# Altium PCB Detect_IR_v2_PCB.PcbDoc
Units mm, origin at the board's own origin, x right, y up, seen from the top; angles counter-clockwise.
Board outline 22.5 x 38.5 mm, 2 copper layers (Top Layer, Bottom Layer), stack 1.571 mm thick; 13 components, 8 nets, 36 pads, 5 vias.
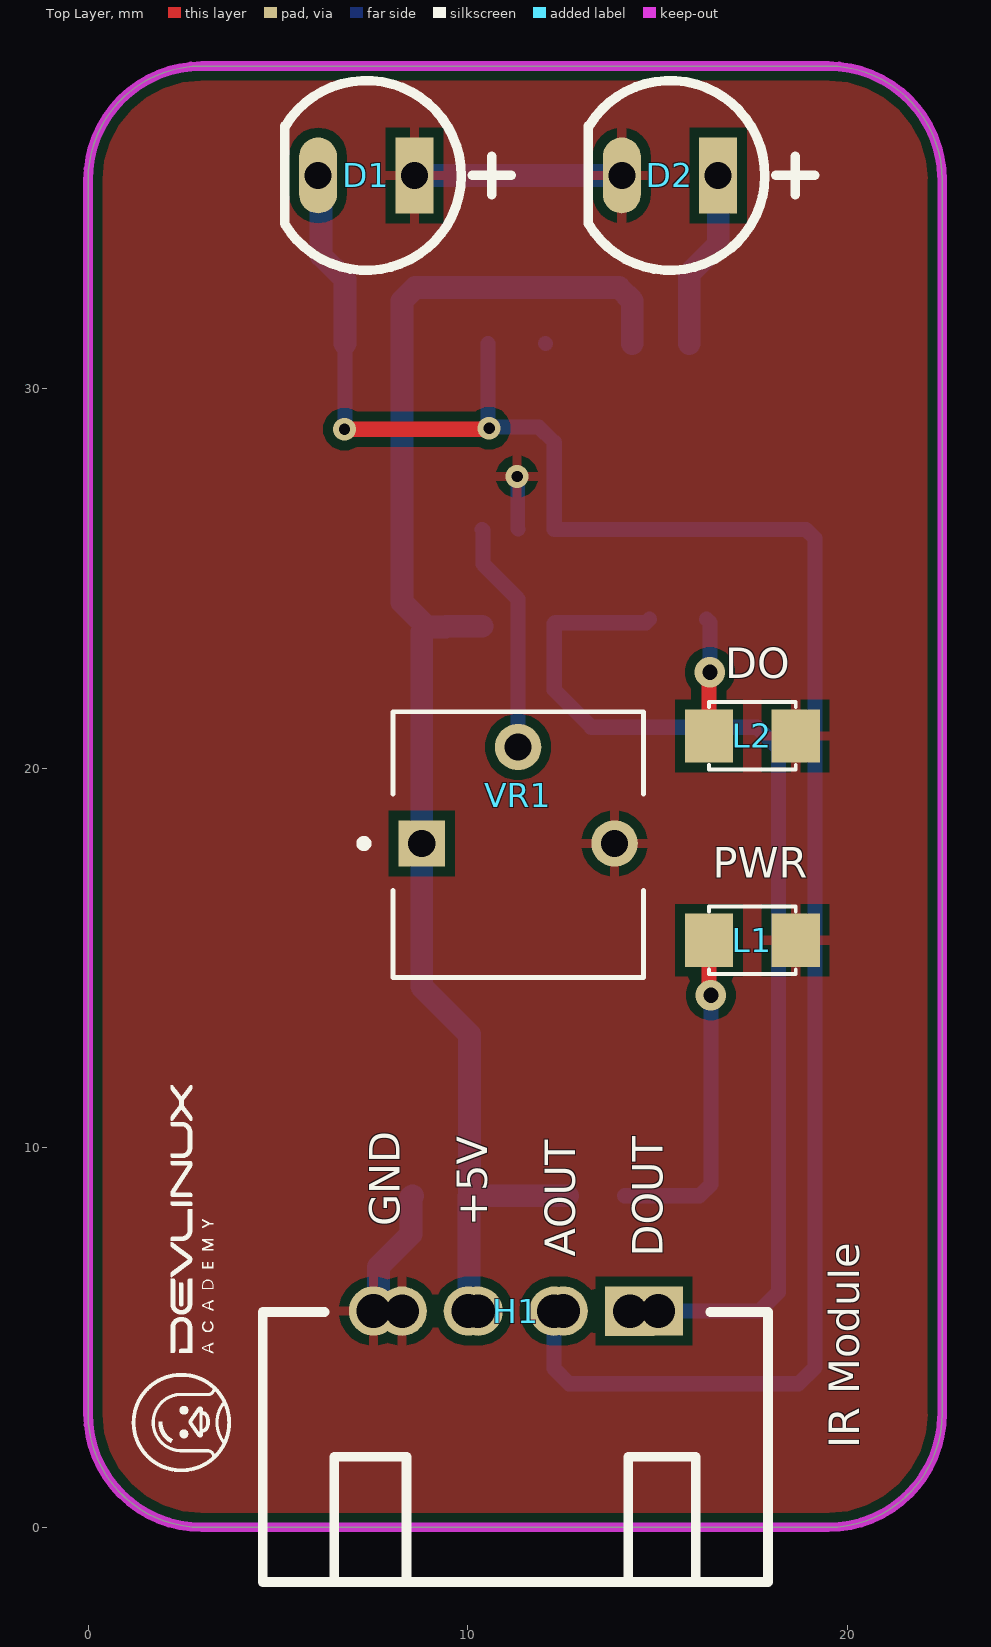
[diagram p0: Top Layer view]
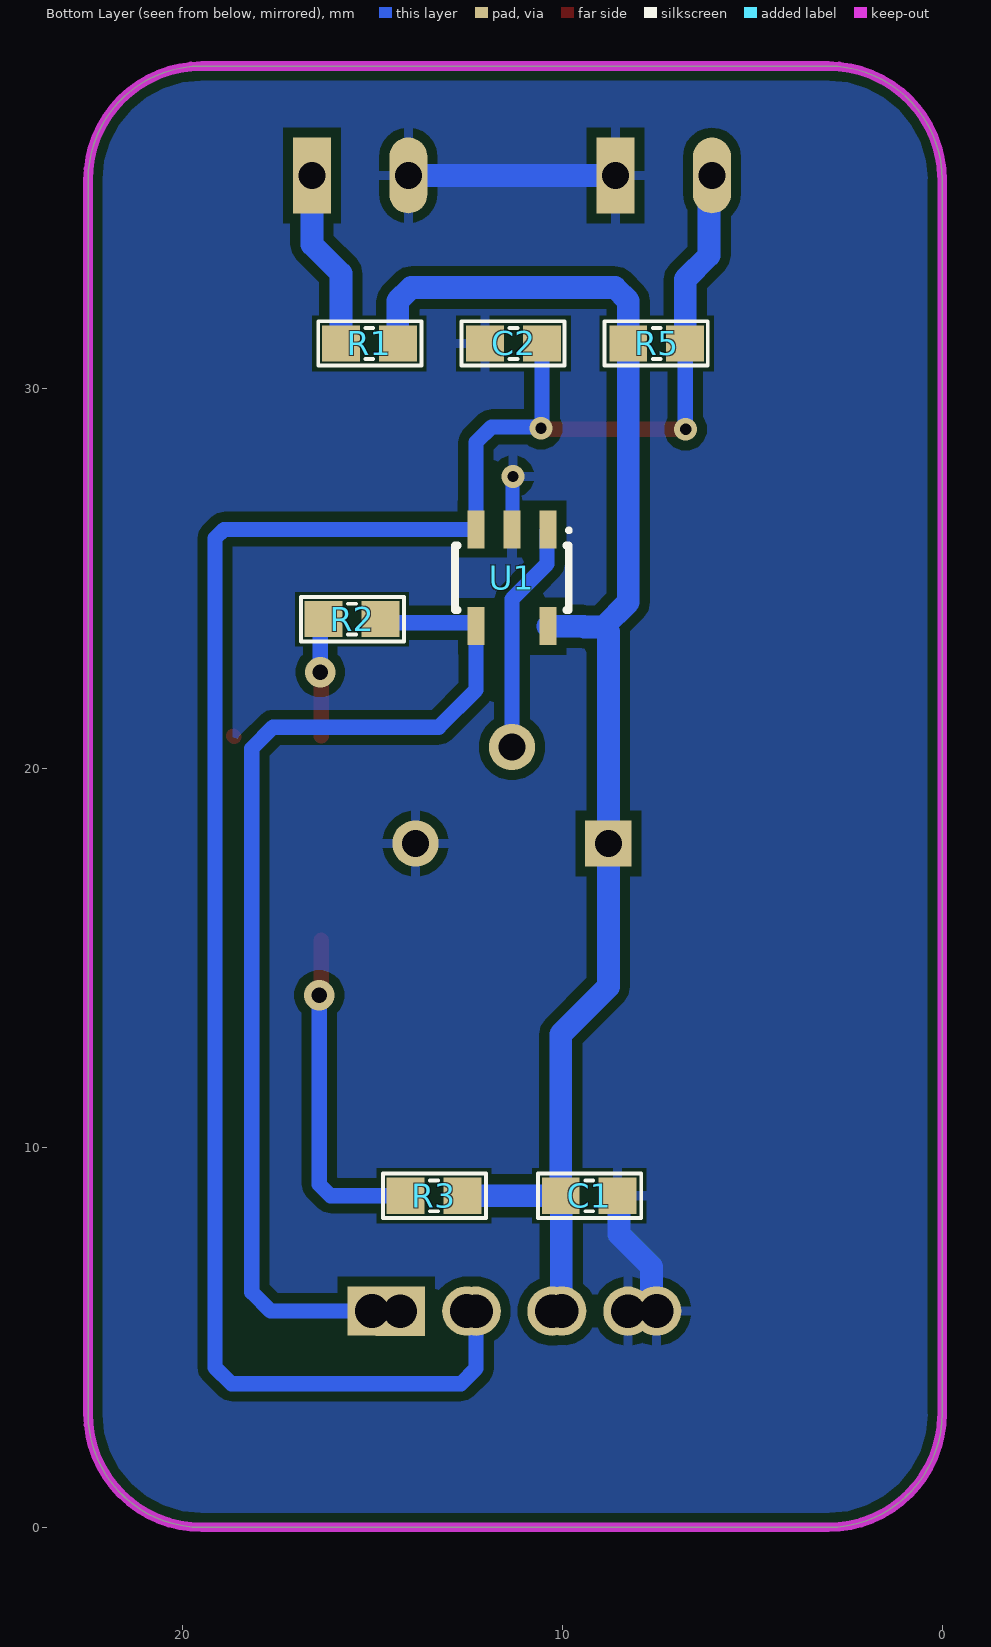
[diagram p1: Bottom Layer view, seen from below]
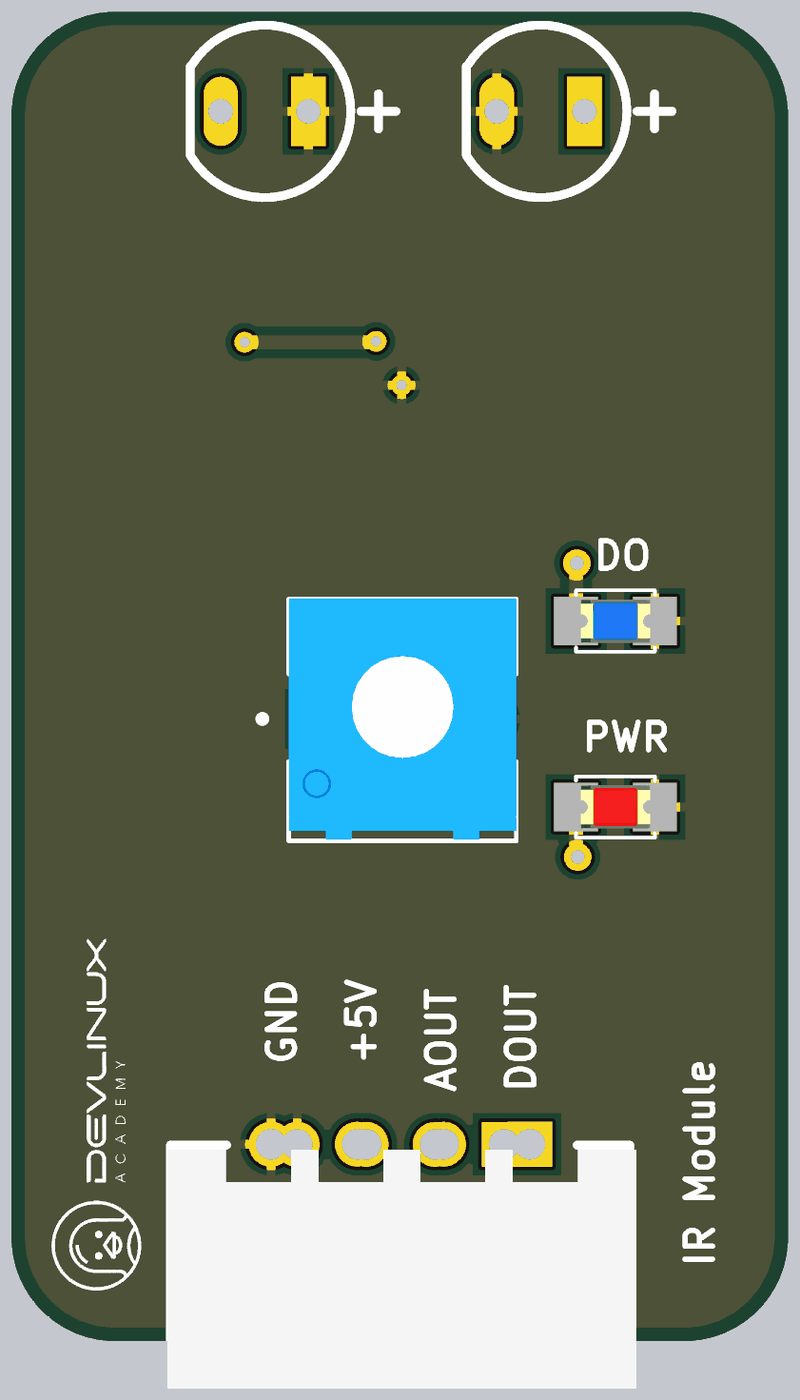
[diagram p2: 3D render of the assembled board from above, using the file's embedded part models]
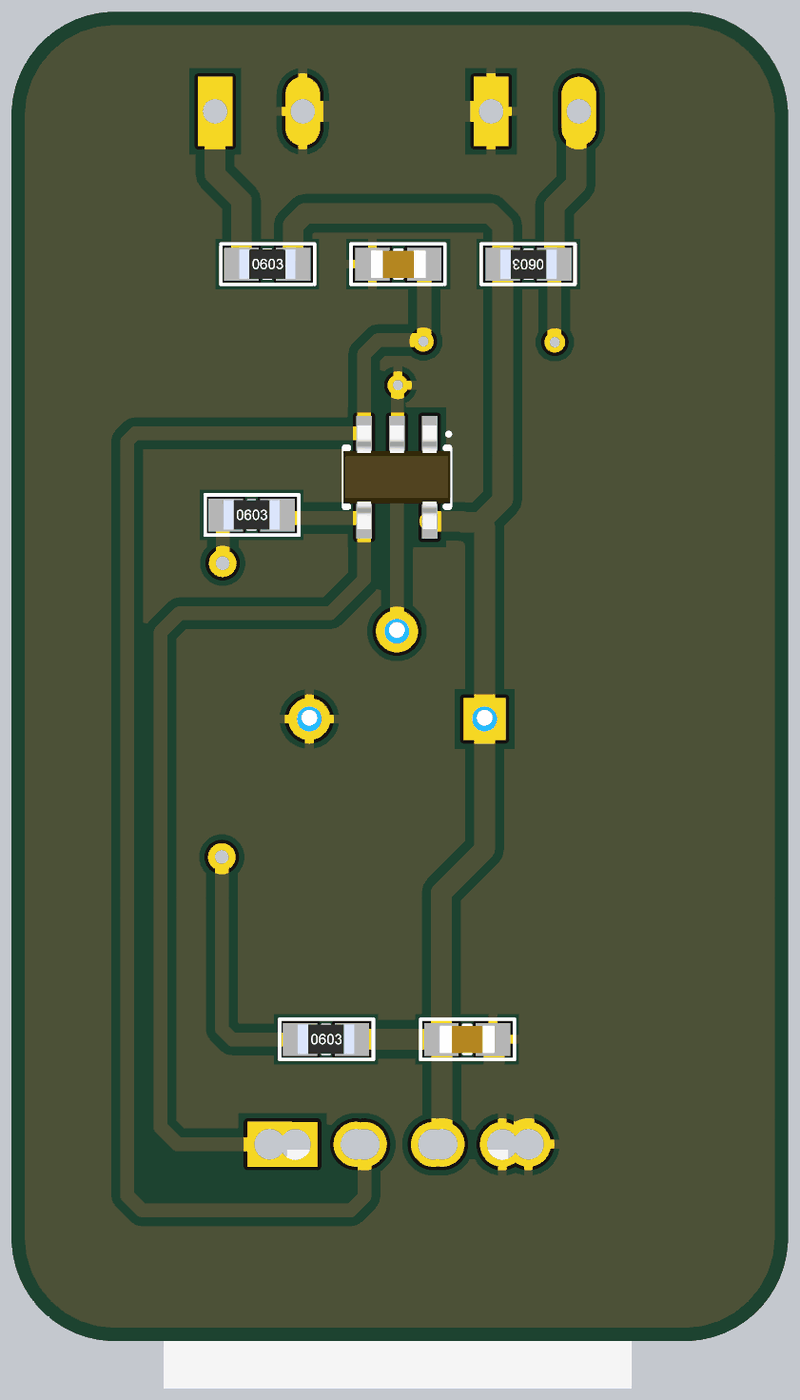
[diagram p3: 3D render of the assembled board from below, using the file's embedded part models]

## Layer stack, top to bottom
Top Solder: solder mask 0.0102, Solder Resist, Dk 3.5
Top Layer: signal copper 0.0356
Dielectric 1: dielectric 1.5, FR-4, Dk 4.8
Bottom Layer: signal copper 0.0356
Bottom Solder: solder mask 0.0102, Solder Resist, Dk 3.5

## Board outline
0,3 0,35.5 cw(c3,35.5) 3,38.5 19.5,38.5 cw(c19.5,35.5) 22.5,35.5 22.5,3 cw(c19.5,3) 19.5,0 3,0 cw(c3,3)

## Design rules (kind name [scope] priority, off if disabled: settings)
Clearance [All] p1: gap=0.254 ignorepadtopadclearanceinfootprint=FALSE except(0: Arc-Hole Track-Hole SMDPad-Hole THPad-Hole Via-Hole Fill-Hole Poly-Hole Region-Hole Text-Hole)
PolygonConnect [All] p1: connectstyle=Relief reliefconductorwidth=0.254 reliefentries=4 polygonreliefangle="90 Angle" airgapwidth=0.254
RoomDefinition Detect_IR_v2_SCH [InComponentClass('Detect_IR_v2_SCH')] p1: confinementstyle=ConfineIn formatcopy=TRUE lockcomponents=FALSE outline -48.133,-46.177 2.667,-46.177 2.667,-20.777 -48.133,-20.777
RoutingVias [All] p1: holewidth=0.4 width=0.8 viastyle="Through Hole" minholewidth=0.3 minwidth=0.6 maxholewidth=0.5 maxwidth=1
SolderMaskExpansion [All] p1: expansion=0.102 istentingtop=FALSE
Width [All] p1: maxlimit=0.6 minlimit=0.254 preferedwidth=0.4
30 further rules are at their usual default settings.

## Components (designator, comment, footprint, x,y, rotation, side; value= is the part's Value field where it differs from the comment)
C1 "100nF" "tu 0603" 9.296,8.738 r180 bottom
C2 "100nF" "tu 0603" 11.29,31.191 r0 bottom
D1 "PT334B" LED_CIRCLE_DIP_2P_5MM 7.332,35.618 r180 top
D2 "PT334C" LED_CIRCLE_DIP_2P_5MM 15.332,35.618 r180 top
H1 "Header 4P 2.54 + 2.0 Duc Cong" "Header 4P DC 2.54 + 2.0" 14.995,5.675 r270 top
L1 "LED RED" LED-0805-Red 16.358,15.469 r0 top
L2 "LED BLUE" LED-0805-Blue 16.358,20.853 r0 top
R1 "330" "tro smd 0603" 15.088,31.191 r180 bottom
R2 "1k" "tro smd 0603" 15.545,23.927 r180 bottom
R3 "1k" "tro smd 0603" 13.386,8.738 r180 bottom
R5 "10k" "tro smd 0603" 7.518,31.191 r0 bottom
U1 "LM321" sot23-5 11.332,25.019 r270 bottom
VR1 "10k" TRIM_3362P-1-102 11.332,18.019 r0 top

## Footprints (in the part's own frame and the unit in brackets; to place one, negate y for a bottom-side part, rotate by r counter-clockwise, add the part's x,y. Pads: shape width x height; smd on the part's side, far side on the other; paste and mask are expansions set on the pad)
"Header 4P DC 2.54 + 2.0" [mm]
  rect 1.3x1.3 hole 0.889: 1(-0.025,0.025) 1(-0.022,-0.719)
  round 1.3 hole 0.889: 2(-0.025,-2.475) 2(-0.022,-2.719) 3(-0.025,-4.975) 3(-0.022,-4.719) 4(-0.025,-7.475) 4(-0.022,-6.718)
  silkscreen extent 0,-10.39 7.11,2.92, body extent 0.13,-10.48 7.06,3.11, height 7.38
LED-0805-Blue [mil]
  rect 50x55 smd: 1(0,0) 2(90,0)
  silkscreen extent 0,-35 90,35, body extent 5,-25 85,25, height 43
LED-0805-Red [mil]
  rect 50x55 smd: 1(0,0) 2(90,0)
  silkscreen extent 0,-35 90,35, body extent 5,-25 85,25, height 43
LED_CIRCLE_DIP_2P_5MM [mm]
  rect 1x2 hole 0.711: 1(-1.27,0)
  oval 1x2 hole 0.711: 2(1.27,0)
  silkscreen extent -3.81,-2.5 2.15,2.5
sot23-5 [mm]
  rect 1x0.45 smd: 1(-1.275,0.95) 2(-1.275,0) 3(-1.275,-0.95) 4(1.275,-0.95) 5(1.275,0.95)
  silkscreen extent -1.3,-1.5 0.85,1.55, body extent -1.5,-1.55 1.5,1.55, height 1.1
TRIM_3362P-1-102 [mm]
  rect 1.222x1.222 / inner round 1.222 / far side rect 1.222x1.222 hole 0.714: 1(-2.54,0)
  round 1.222 hole 0.714: 2(0,2.54) 3(2.54,0)
  silkscreen extent -4.16,-3.53 3.3,3.47, body extent -3.3,-3.49 3.3,3.49, height 4.88
"tro smd 0603" [mm] "Chip Capacitor, 2-Leads, Body 1,60x0,80mm, IPC Medium Density"
  rect 1x0.95 smd mask+0.076: 1(-0.75,0) 2(0.75,0)
  silkscreen extent -1.35,-0.58 1.37,0.58, body extent -0.82,-0.42 0.82,0.43, height 0.44
"tu 0603" [mm] "Chip Capacitor, 2-Leads, Body 1,60x0,80mm, IPC Medium Density"
  rect 1x0.95 smd mask+0.076: 1(-0.75,0) 2(0.75,0)
  silkscreen extent -1.35,-0.58 1.37,0.58, body extent -0.8,-0.4 0.8,0.4, height 0.9

## Part data
C1 C2: library part "Tu 0603 104 50V 10%", "Dán", Chung_Loai=Dán, Don_Vi=Con, Ma_Hang=MH004568, So_Chan=2, Ten_Linh_Kien="Tụ 0603 104-100nF 10% 50V"
D1 D2: library part LED_DIP_2P, "Led"
H1: "Cắm", Chung_Loai=Cắm, Don_Vi=Con, Ma_Hang=MH001310, Ten_Linh_Kien="Header 4P XH2.54-4P Đực Cong"
L1: library part "LED 0805 Do", "Dán", Chung_Loai=Dán, Don_Vi=Con, Ma_Hang=MH000897, Ten_Linh_Kien="LED 0805 Màu Đỏ (Red)"
L2: library part "LED 0805 Xanh Duong", "Dán", Chung_Loai=Dán, Don_Vi=Con, Ma_Hang=MH002327, Ten_Linh_Kien="LED 0805 Màu Xanh Dương (Blue)"
R1 R5: library part "Tro 0603 1% 10k", "Dán", Chung_Loai=Dán, Don_Vi=Con, Ma_Hang=MH006333, So_Chan=2, Ten_Linh_Kien="Trở 0603 1% 10k"
R2 R3: library part "Tro 0603 1% 1k", "Dán", Chung_Loai=Dán, Don_Vi=Con, Ma_Hang=MH006334, So_Chan=2, Ten_Linh_Kien="Trở 0603 1% 1k"
U1: "Opamp"
VR1: library part "Bien tro vuong", "TRIMMER - 1/4in SQ ST CERMET", Package="3362P-1 Bourns Inc.", Check_prices=https://www.snapeda.com/parts/3362P-1-102/Bourns/view-part/?ref=eda, MF=Bourns, MP=3362P-1-102, SnapEDA_Link=https://www.snapeda.com/parts/3362P-1-102/Bourns/view-part/?ref=snap

## Via types
v1: diameter 0.6, hole 0.3, Top Layer to Bottom Layer, 3 vias
v2: diameter 0.8, hole 0.4, Top Layer to Bottom Layer, 2 vias

## Nets (pads, with @x,y where several pads share a name; then routed paths per layer and width w, separated by ;. In a path a pad name is that pad's centre, name@x,y a point inside that pad or via, vN(x,y) a via of type N, cw(c..) or ccw(c..) an arc to the next point about the centre after c; other vN are vias at no path point)
+5: C1.1 H1.3 R1.2 R3.2 R5.2 U1.5 VR1.1 | length 39
  Bottom Layer w0.6: H1.3@10.02,5.7 10.033,5.713 10.033,8.724 C1.1 ; U1.5 9.443,23.744 9.418,23.718 8.921,23.718 ; R3.2 C1.1 ; R1.2 14.338,32.313 13.986,32.664 8.62,32.664 8.268,32.313 R5.2 8.268,24.371 8.921,23.718 ; 8.921,23.718 8.792,23.589 VR1.1 8.792,14.246 10.046,12.991 C1.1
A_OUT: C2.1 D1.2 H1.2 R5.1 U1.3 | length 54.8
  Top Layer w0.4: v1(6.756,28.931) 10.541,28.931 v1(10.566,28.956)
  Bottom Layer w0.4: v1(6.756,28.931) 6.768,28.943 R5.1 ; C2.1 10.54,28.982 v1(10.566,28.956) 10.605,28.994 11.874,28.994 12.282,28.587 U1.3 18.917,26.294 19.152,26.059 19.152,4.216 18.72,3.785 12.675,3.785 12.276,4.183 H1.2@12.276,5.697
  Bottom Layer w0.6: D1.2 6.138,35.542 6.138,33.511 6.768,32.881 R5.1
D_OUT: H1.1 R2.2 U1.4 | length 28.6
  Bottom Layer w0.4: R2.2 14.703,23.835 12.307,23.835 12.282,23.81 U1.4 12.282,22.059 13.259,21.082 17.628,21.082 18.186,20.523 18.186,6.198 17.689,5.7 H1.1@15.02,5.7
GND: C1.2 C2.2 D1.1 D2.2 H1.4 L1.2 L2.2 U1.2 VR1.3 | length 10.4
  Top Layer w0.381: L2.2@18.644,20.828 L2.2@18.669,20.853
  Bottom Layer w0.381: v1(11.303,27.686) 11.317,27.672 11.317,26.308 U1.2 ; C2.2 C2.2@12.053,31.179
  Bottom Layer w0.6: H1.4@7.52,5.7 7.654,5.834 7.654,6.867 8.512,7.724 8.512,8.703 C1.2 ; D1.1 D2.2
NetD2_1: D2.1 R1.1 | length 4.7
  Bottom Layer w0.6: R1.1 15.838,33.033 16.602,33.797 D2.1
NetL1_1: L1.1 R3.1 | length 8.9
  Top Layer w0.4: L1.1 16.358,14.072 v2(16.408,14.021)
  Bottom Layer w0.4: R3.1 16.111,8.738 16.408,9.035 v2(16.408,14.021)
NetL2_1: L2.1 R2.1 | length 3.1
  Top Layer w0.4: v2@16.332,22.53 16.358,22.504 L2.1
  Bottom Layer w0.4: R2.1 16.383,23.839 v2(16.383,22.53)
NetU1_1: U1.1 VR1.2 | length 6.1
  Bottom Layer w0.4: U1.1 10.407,26.269 10.407,25.382 11.332,24.457 VR1.2

## Polygon pours and split planes (outlines as drawn)
GND on Top Layer "NONET_L-01_P-001" (solid, remove dead copper, pour order 0): -3.683,46.66 -3.251,47.092 29.921,47.092 29.921,-3.785 31.826,-5.69 31.648,-5.867 -2.413,-5.867
GND on Bottom Layer "NONET_L-01_P-001" (solid, remove dead copper, pour order 1): -3.937,47.65 29.921,47.65 30.836,46.736 30.836,-6.96 -2.311,-6.96 -2.946,-6.325

## Keep-outs
Keep-Out Layer:
  the board outline again, w0.254

## Silkscreen, mask and mechanical layers (free items; w line width, h text height)
Top Overlay:
  drawing of 21 lines, arcs and shapes, not listed
  text "DO" at 16.787,22.375 h0.8
  text "PWR" at 16.457,17.117 h0.8
  text "GND" at 8.207,7.935 h0.8 r90
  text "+5V" at 10.518,7.935 h0.8 r90
  text "AOUT" at 12.829,7.135 h0.8 r90
  text "DOUT" at 15.141,7.135 h0.8 r90
  text "IR Module" at 20.322,2.08 h0.8 r90